# EAGLE board 74HC-RGB-Cube (EAGLE 6.5.0)
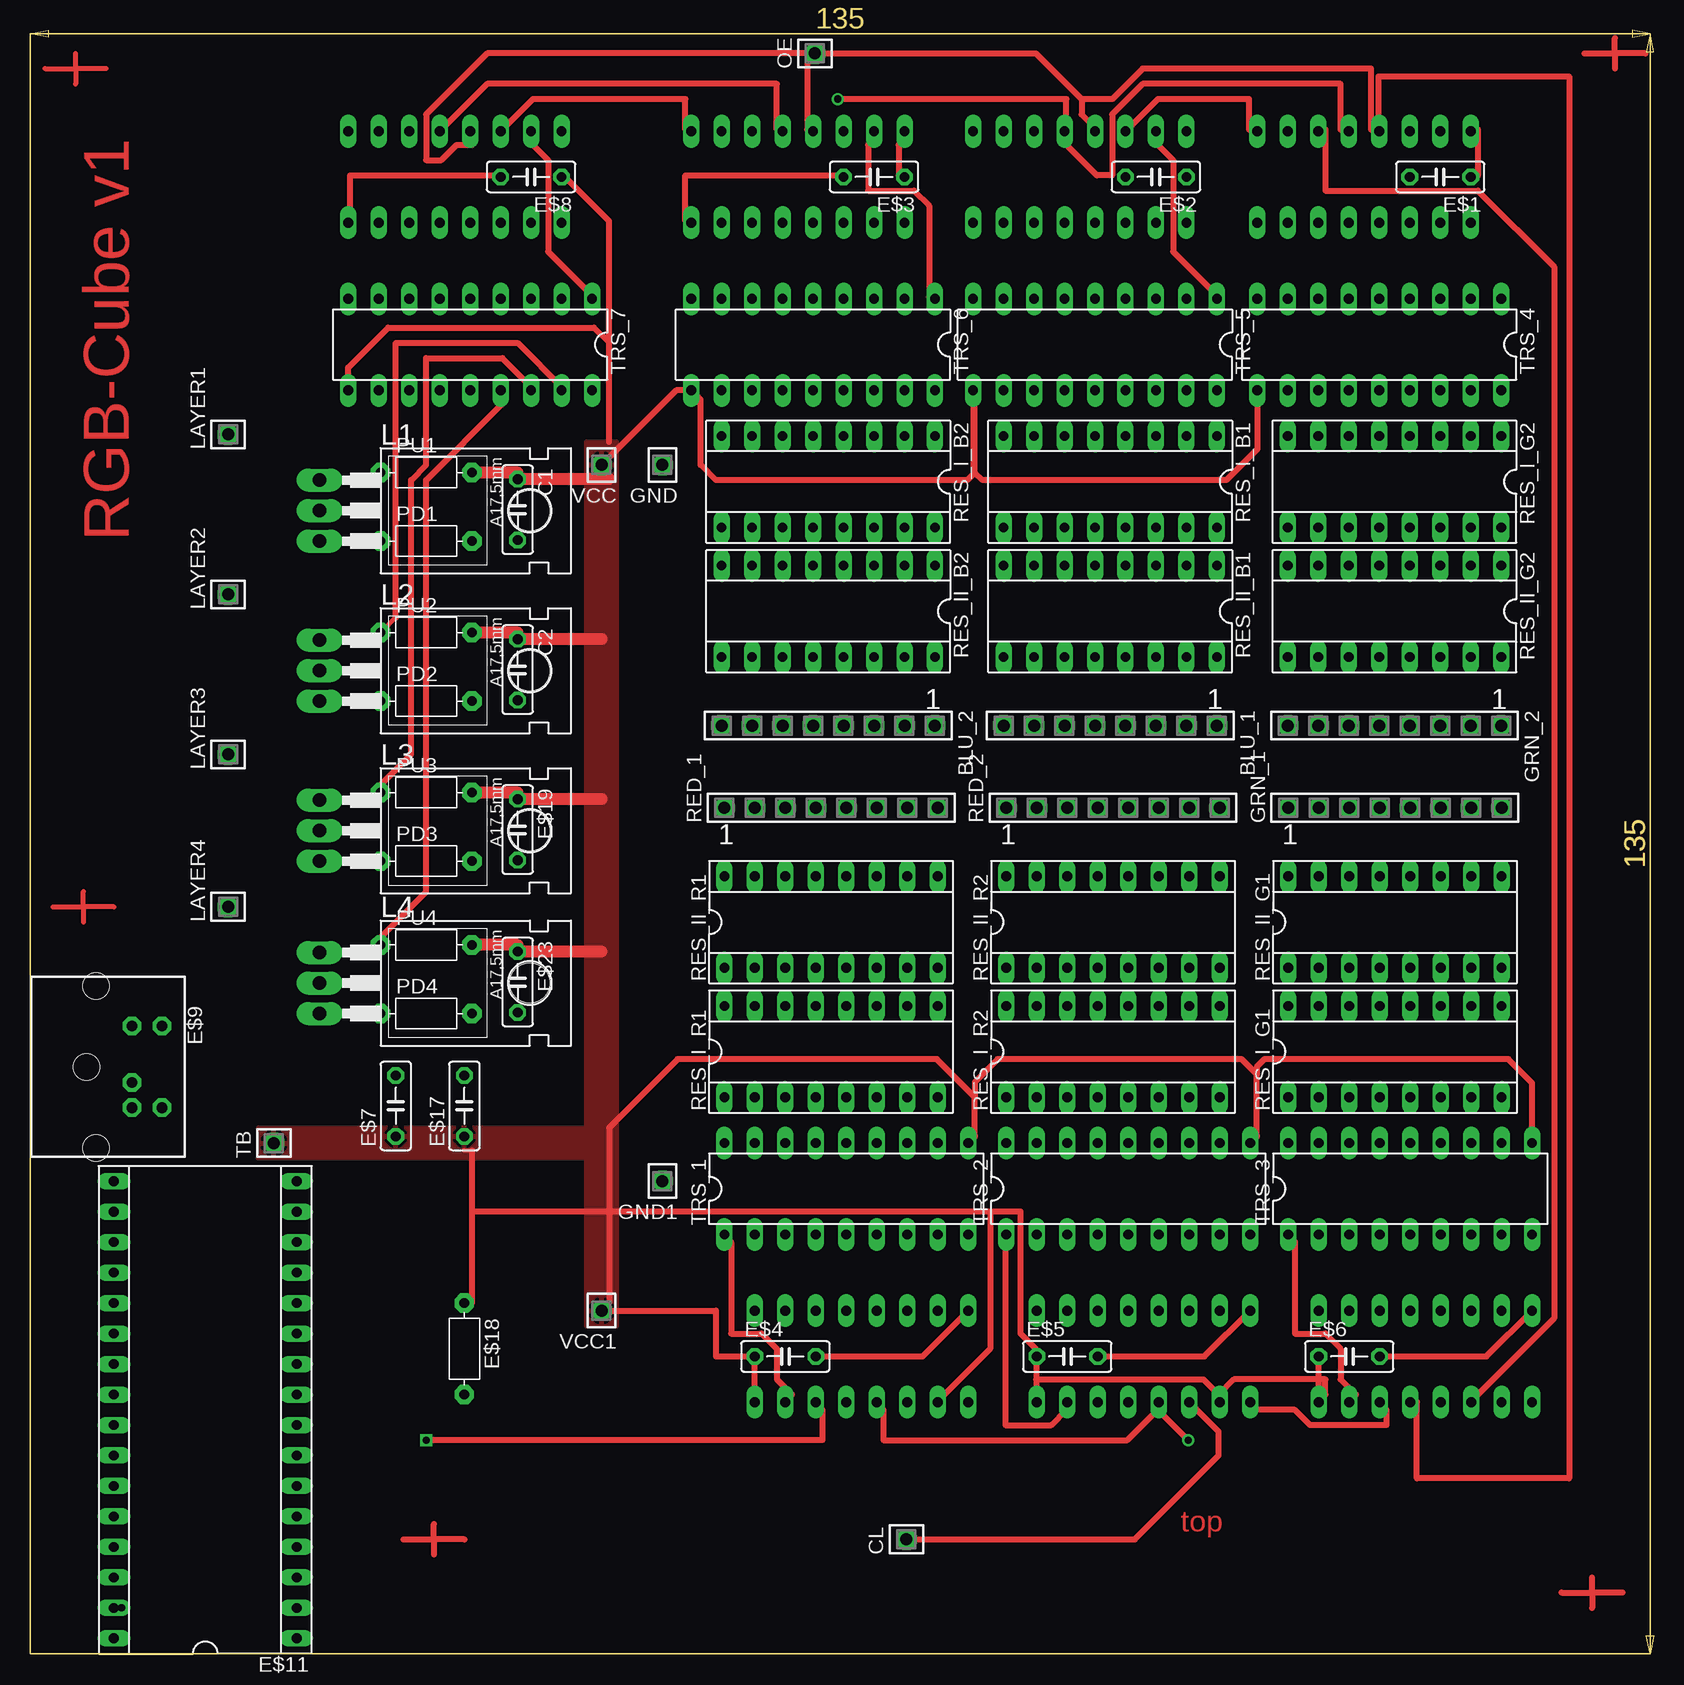
[diagram p0: board, top side]
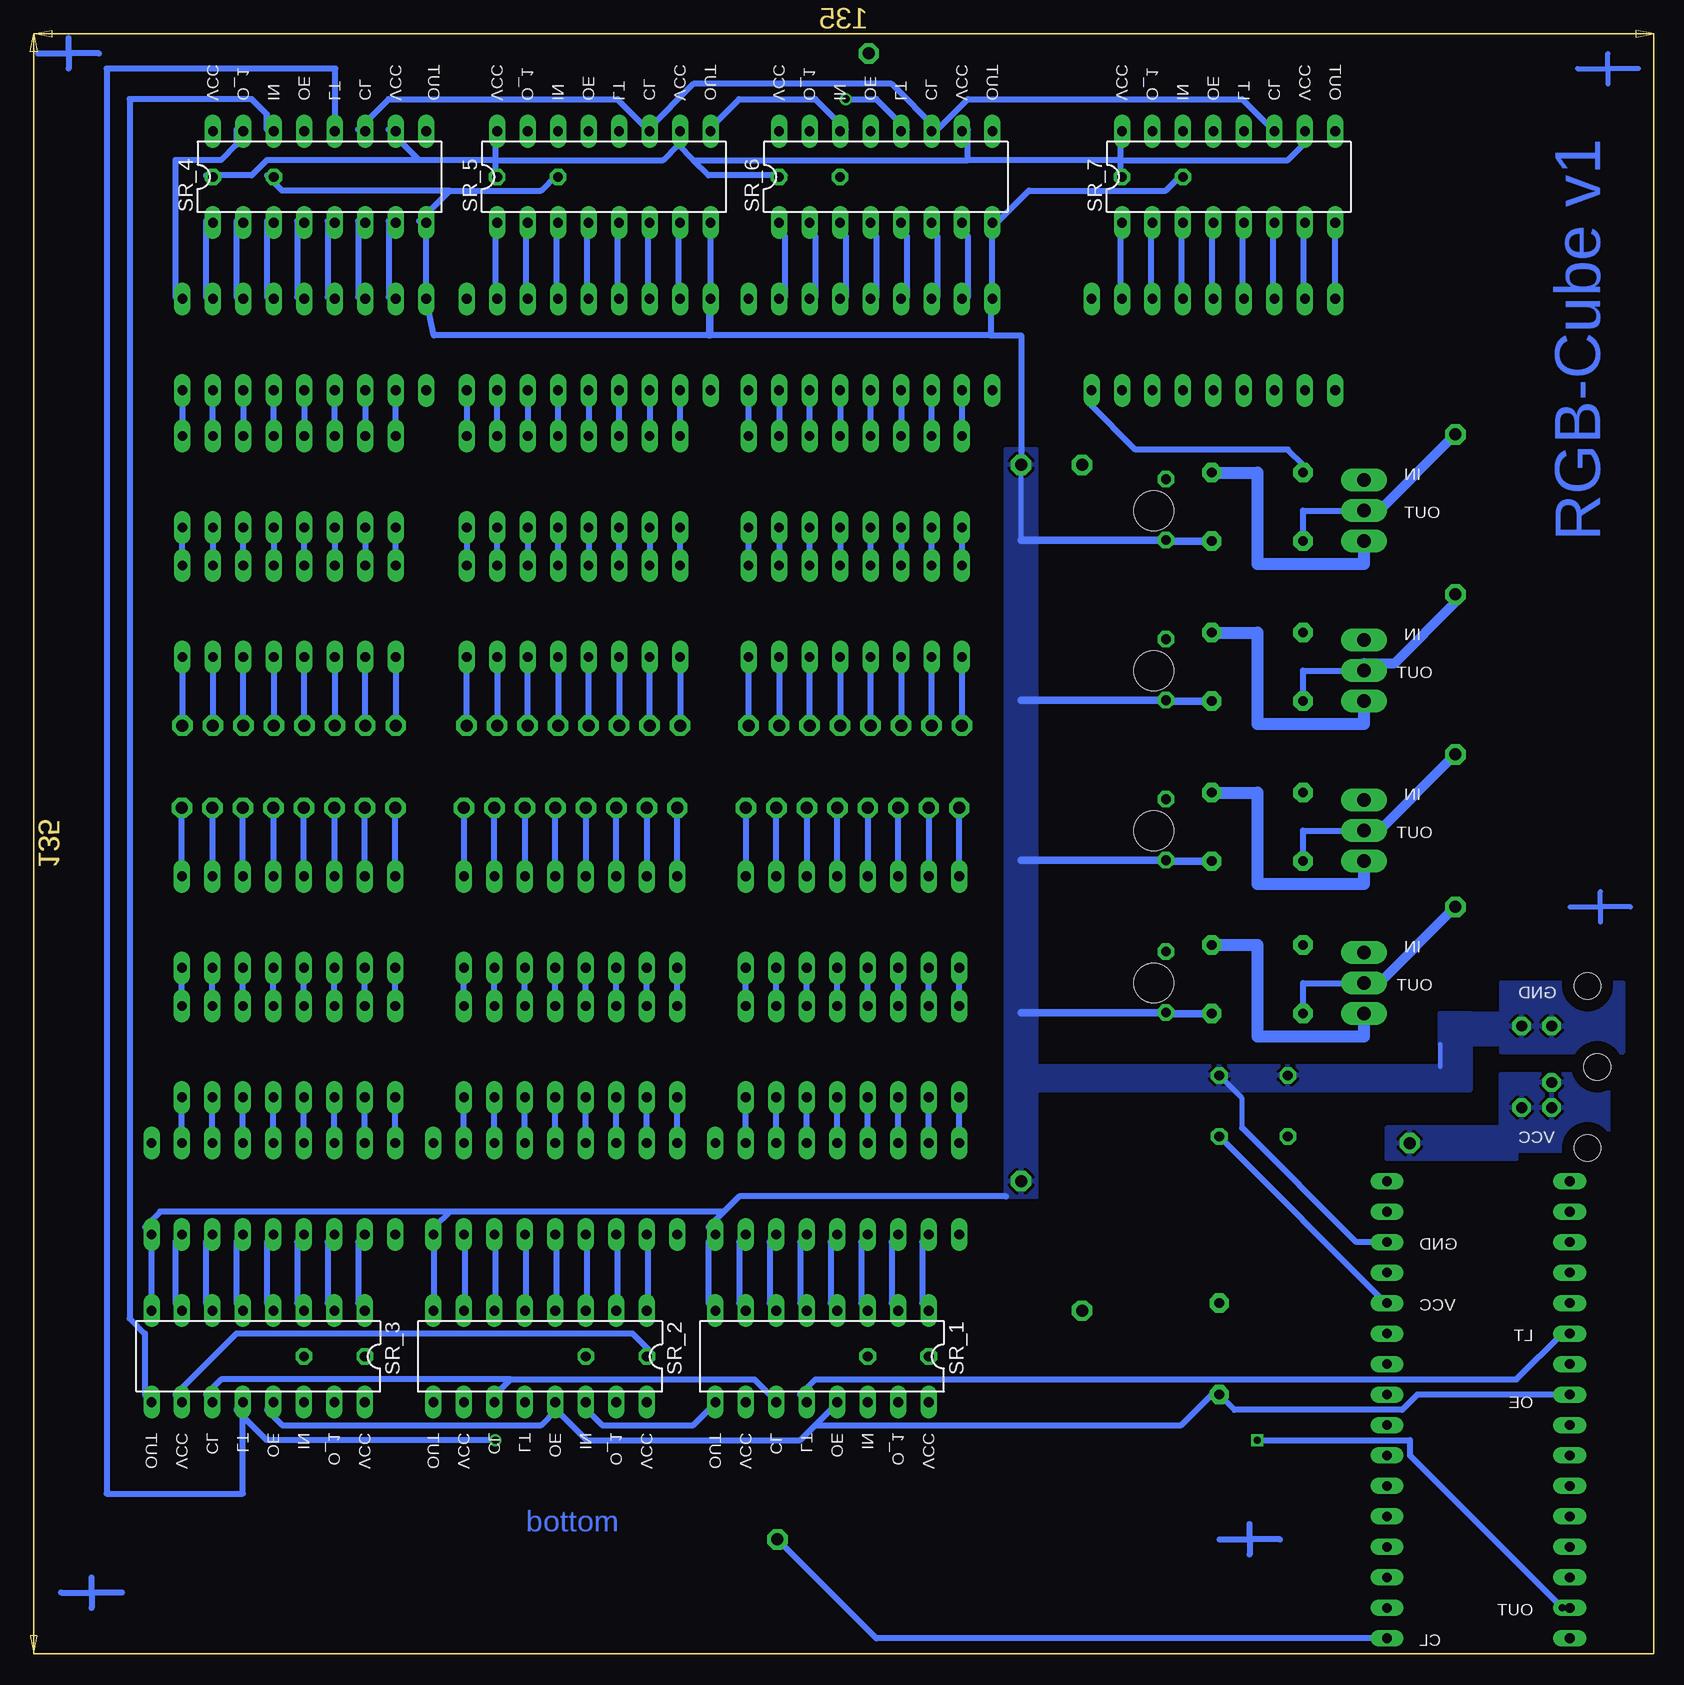
[diagram p1: board, bottom side, seen from below]

Size 135.3 x 135.3 mm. Coordinates in mm from the lower left corner, seen from the top.
Copper layers (1*16): Top 0.035mm / dielectric 1.5mm / Bottom 0.035mm
Design rules "default *": minimum track width 15mil, minimum drill 24mil, track to track 8mil, track to pad 8mil, pad to pad 8mil, via to via 8mil, smd to smd 8mil, copper to edge 40mil, drill to drill 8mil, minimum pad ring 10mil, minimum via ring 8mil, stop-mask expansion 4mil, vias tented up to drill 0mil, thermal gap 10mil

## Footprints (pad centres in the part's own frame; a part is rotated, then mirrored left to right if it is on the bottom)
SSW-108-02-S-S = drill 1 pad 1.5 octagon: 1 -8.89,0; 2 -6.35,0; 3 -3.81,0; 4 -1.27,0; 5 1.27,0; 6 3.81,0; 7 6.35,0; 8 8.89,0
C050-025X075 = drill 0.813 octagon: 1 -2.54,0; 2 2.54,0
SSW-101-02-S-S = drill 1 pad 1.5 octagon: 1 0,0
MDIN05SS = drill 0.9 octagon: 1 1.3,8.5; 2 3.4,8.5; 3 -3.4,8.5; 4 3.4,11; 5 -3.4,11 | hole 2.2: -6.75,5.5; 0,4.7; 6.75,5.5
SOCKET-32 = drill 0.813 long: 1 -19.05,-7.62; 2 -16.51,-7.62; 3 -13.97,-7.62; 4 -11.43,-7.62; 5 -8.89,-7.62; 6 -6.35,-7.62; 7 -3.81,-7.62; 8 -1.27,-7.62; 9 1.27,-7.62; 10 3.81,-7.62; 11 6.35,-7.62; 12 8.89,-7.62; 13 11.43,-7.62; 14 13.97,-7.62; 15 16.51,-7.62; 16 19.05,-7.62; 17 19.05,7.62; 18 16.51,7.62; 19 13.97,7.62; 20 11.43,7.62; 21 8.89,7.62; 22 6.35,7.62; 23 3.81,7.62; 24 1.27,7.62; 25 -1.27,7.62; 26 -3.81,7.62; 27 -6.35,7.62; 28 -8.89,7.62; 29 -11.43,7.62; 30 -13.97,7.62; 31 -16.51,7.62; 32 -19.05,7.62
R-7,5 = drill 0.813 pad 1.6 octagon: 1 -3.81,0; 2 3.81,0
TO220AB = drill 1.118 long: A1 -2.54,-6.35; A2 2.54,-6.35; C 0,-6.35 | hole 3.302: 0,11.176
SOCKET-16 = drill 0.813 long: 1 -8.89,-3.81; 2 -6.35,-3.81; 3 -3.81,-3.81; 4 -1.27,-3.81; 5 1.27,-3.81; 6 3.81,-3.81; 7 6.35,-3.81; 8 8.89,-3.81; 9 8.89,3.81; 10 6.35,3.81; 11 3.81,3.81; 12 1.27,3.81; 13 -1.27,3.81; 14 -3.81,3.81; 15 -6.35,3.81; 16 -8.89,3.81
DIL16 = drill 0.813 long: 1 -8.89,-3.81; 2 -6.35,-3.81; 3 -3.81,-3.81; 4 -1.27,-3.81; 5 1.27,-3.81; 6 3.81,-3.81; 7 6.35,-3.81; 8 8.89,-3.81; 9 8.89,3.81; 10 6.35,3.81; 11 3.81,3.81; 12 1.27,3.81; 13 -1.27,3.81; 14 -3.81,3.81; 15 -6.35,3.81; 16 -8.89,3.81
DIL18 = drill 0.813 long: 1 -10.16,-3.81; 2 -7.62,-3.81; 3 -5.08,-3.81; 4 -2.54,-3.81; 5 0,-3.81; 6 2.54,-3.81; 7 5.08,-3.81; 8 7.62,-3.81; 9 10.16,-3.81; 10 10.16,3.81; 11 7.62,3.81; 12 5.08,3.81; 13 2.54,3.81; 14 0,3.81; 15 -2.54,3.81; 16 -5.08,3.81; 17 -7.62,3.81; 18 -10.16,3.81

## Placement (x,y rotation side)
BLU_1  [SSW-108-02-S-S]  90.02,77.33 180 top
BLU_2  [SSW-108-02-S-S]  66.53,77.33 180 top
C1  47uF  [C050-025X075]  40.64,95.33 270 top
C2  47uF  [C050-025X075]  40.64,82 270 top
CL  [SSW-101-02-S-S]  73.03,9.53 0 top
E$1  [C050-025X075]  117.52,123.06 180 top
E$2  [C050-025X075]  93.83,123.06 180 top
E$3  [C050-025X075]  70.33,123.06 180 top
E$4  [C050-025X075]  62.95,24.77 0 top
E$5  [C050-025X075]  86.44,24.77 0 top
E$6  [C050-025X075]  109.94,24.77 0 top
E$7  47uF  [C050-025X075]  30.48,45.64 90 top
E$8  [C050-025X075]  41.76,123.06 180 top
E$9  [MDIN05SS]  0,48.9 270 top
E$11  [SOCKET-32]  14.61,20.32 90 top
E$17  0.1uF  [C050-025X075]  36.2,45.64 90 top
E$18  10k  [R-7,5]  36.2,25.4 270 top
E$19  47uF  [C050-025X075]  40.64,68.66 270 top
E$23  47uF  [C050-025X075]  40.64,55.96 270 top
GND  [SSW-101-02-S-S]  52.7,99.06 90 top
GND1  [SSW-101-02-S-S]  52.7,39.37 90 top
GRN_1  [SSW-108-02-S-S]  113.75,70.48 0 top
GRN_2  [SSW-108-02-S-S]  113.71,77.33 180 top
L1  [TO220AB]  30.48,95.25 270 top
L2  [TO220AB]  30.48,81.92 270 top
L3  [TO220AB]  30.48,68.58 270 top
L4  [TO220AB]  30.48,55.88 270 top
LAYER1  [SSW-101-02-S-S]  16.51,101.6 0 top
LAYER2  [SSW-101-02-S-S]  16.51,88.27 0 top
LAYER3  [SSW-101-02-S-S]  16.51,74.93 0 top
LAYER4  [SSW-101-02-S-S]  16.51,62.23 0 top
OE  [SSW-101-02-S-S]  65.41,133.35 0 top
PD1  10k  [R-7,5]  33.02,92.71 0 top
PD2  10k  [R-7,5]  33.02,79.38 0 top
PD3  10k  [R-7,5]  33.02,66.04 0 top
PD4  10k  [R-7,5]  33.02,53.34 0 top
PU1  10k  [R-7,5]  33.02,98.42 0 top
PU2  10k  [R-7,5]  33.02,85.09 0 top
PU3  10k  [R-7,5]  33.02,71.75 0 top
PU4  10k  [R-7,5]  33.02,59.05 0 top
RED_1  [SSW-108-02-S-S]  66.75,70.48 0 top
RED_2  [SSW-108-02-S-S]  90.25,70.48 0 top
RES_I_B1  Resitor I  [SOCKET-16]  90.02,97.66 180 top
RES_I_B2  Resitor I  [SOCKET-16]  66.53,97.66 180 top
RES_I_G1  Resitor I  [SOCKET-16]  113.75,50.16 0 top
RES_I_G2  Resitor I  [SOCKET-16]  113.71,97.66 180 top
RES_I_R1  Resitor I  [SOCKET-16]  66.75,50.16 0 top
RES_I_R2  Resitor I  [SOCKET-16]  90.25,50.16 0 top
RES_II_B1  Resistor II  [SOCKET-16]  90.02,86.86 180 top
RES_II_B2  Resistor II  [SOCKET-16]  66.53,86.86 180 top
RES_II_G1  Resistor II  [SOCKET-16]  113.75,60.96 0 top
RES_II_G2  Resistor II  [SOCKET-16]  113.71,86.86 180 top
RES_II_R1  Resistor II  [SOCKET-16]  66.75,60.96 0 top
RES_II_R2  Resistor II  [SOCKET-16]  90.25,60.96 0 top
SR_1  74HC595N  [DIL16]  69.3,24.77 180 bottom
SR_2  74HC595N  [DIL16]  92.79,24.77 180 bottom
SR_3  74HC595N  [DIL16]  116.28,24.77 180 bottom
SR_4  74HC595N  [DIL16]  111.17,123.06 0 bottom
SR_5  74HC595N  [DIL16]  87.48,123.06 0 bottom
SR_6  74HC595N  [DIL16]  63.98,123.06 0 bottom
SR_7  74HC595N  [DIL16]  35.41,123.06 0 bottom
TB  [SSW-101-02-S-S]  20.32,42.55 0 top
TRS_1  ULN2803B  [DIL18]  68.03,38.73 0 top
TRS_2  ULN2803B  [DIL18]  91.52,38.73 0 top
TRS_3  ULN2803B  [DIL18]  115.02,38.73 0 top
TRS_4  ULN2803B  [DIL18]  112.44,109.08 180 top
TRS_5  ULN2803B  [DIL18]  88.75,109.08 180 top
TRS_6  ULN2803B  [DIL18]  65.25,109.08 180 top
TRS_7  ULN2803B  [DIL18]  36.68,109.08 180 top
VCC  [SSW-101-02-S-S]  47.62,99.06 90 top
VCC1  [SSW-101-02-S-S]  47.62,28.57 90 top

## Library data of the parts
BLU_1 BLU_2 CL GND GND1 GRN_1 GRN_2 LAYER1-LAYER4 OE RED_1 RED_2 TB VCC VCC1 = con-samtec
C1 C2 E$1-E$8 E$17 E$19 E$23 = rcl
E$9 = con-yamaichi
E$11 RES_I_B1 RES_I_B2 RES_I_G1 RES_I_G2 RES_I_R1 RES_I_R2 RES_II_B1 RES_II_B2 RES_II_G1 RES_II_G2 RES_II_R1 RES_II_R2 = ic-package
E$18 PD1-PD4 PU1-PU4 = discrete
L1-L4 = diode
SR_1-SR_7 = 74xx-eu
TRS_1-TRS_7 = uln-udn

## Nets
CL: CL.1 E$11.1 SR_1.11 SR_2.11 SR_3.11 SR_4.11 SR_5.11 SR_6.11 SR_7.11
GND: C1.2 C2.2 E$1.2 E$2.2 E$3.2 E$4.2 E$5.2 E$6.2 E$7.2 E$8.2 E$9.3 E$9.5 E$11.14 E$17.2 E$19.2 E$23.2 GND1.1 GND.1 PD1.2 PD2.2 PD3.2 PD4.2 SR_1.8 SR_2.8 SR_3.8 SR_4.8 SR_5.8 SR_6.8 SR_7.8 TRS_1.9 TRS_2.9 TRS_3.9 TRS_4.9 TRS_5.9 TRS_6.9 TRS_7.9
LT: E$11.22 SR_1.12 SR_2.12 SR_3.12 SR_4.12 SR_5.12 SR_6.12 SR_7.12
OE: E$11.24 E$18.2 OE.1 SR_1.13 SR_2.13 SR_3.13 SR_4.13 SR_5.13 SR_6.13 SR_7.13
S$1: SR_1.7 TRS_1.8
S$2: SR_1.6 TRS_1.7
S$3: SR_1.5 TRS_1.6
S$4: SR_1.4 TRS_1.5
S$5: SR_1.3 TRS_1.4
S$6: SR_1.2 TRS_1.3
S$7: SR_1.1 TRS_1.2
S$8: SR_1.15 TRS_1.1
S$9: RES_I_R1.8 TRS_1.11
S$10: RES_I_R1.7 TRS_1.12
S$11: RES_I_R1.6 TRS_1.13
S$12: RES_I_R1.5 TRS_1.14
S$13: RES_I_R1.4 TRS_1.15
S$14: RES_I_R1.3 TRS_1.16
S$15: RES_I_R1.2 TRS_1.17
S$16: RES_I_R1.1 TRS_1.18
S$17: RES_I_R1.16 RES_II_R1.1
S$18: RES_I_R1.15 RES_II_R1.2
S$19: RES_I_R1.14 RES_II_R1.3
S$20: RES_I_R1.13 RES_II_R1.4
S$21: RES_I_R1.12 RES_II_R1.5
S$22: RES_I_R1.11 RES_II_R1.6
S$23: RES_I_R1.10 RES_II_R1.7
S$24: RES_I_R1.9 RES_II_R1.8
S$25: RED_1.1 RES_II_R1.16
S$26: RED_1.2 RES_II_R1.15
S$27: RED_1.3 RES_II_R1.14
S$28: RED_1.4 RES_II_R1.13
S$29: RED_1.5 RES_II_R1.12
S$30: RED_1.6 RES_II_R1.11
S$31: RED_1.7 RES_II_R1.10
S$32: RED_1.8 RES_II_R1.9
S$33: SR_2.7 TRS_2.8
S$34: SR_2.6 TRS_2.7
S$35: SR_2.5 TRS_2.6
S$36: SR_2.4 TRS_2.5
S$37: SR_2.3 TRS_2.4
S$38: SR_2.2 TRS_2.3
S$39: SR_2.1 TRS_2.2
S$40: SR_2.15 TRS_2.1
S$41: RES_I_R2.8 TRS_2.11
S$42: RES_I_R2.7 TRS_2.12
S$43: RES_I_R2.6 TRS_2.13
S$44: RES_I_R2.5 TRS_2.14
S$45: RES_I_R2.4 TRS_2.15
S$46: RES_I_R2.3 TRS_2.16
S$47: RES_I_R2.2 TRS_2.17
S$48: RES_I_R2.1 TRS_2.18
S$49: RES_I_R2.16 RES_II_R2.1
S$50: RES_I_R2.15 RES_II_R2.2
S$51: RES_I_R2.14 RES_II_R2.3
S$52: RES_I_R2.13 RES_II_R2.4
S$53: RES_I_R2.12 RES_II_R2.5
S$54: RES_I_R2.11 RES_II_R2.6
S$55: RES_I_R2.10 RES_II_R2.7
S$56: RES_I_R2.9 RES_II_R2.8
S$57: RED_2.1 RES_II_R2.16
S$58: RED_2.2 RES_II_R2.15
S$59: RED_2.3 RES_II_R2.14
S$60: RED_2.4 RES_II_R2.13
S$61: RED_2.5 RES_II_R2.12
S$62: RED_2.6 RES_II_R2.11
S$63: RED_2.7 RES_II_R2.10
S$64: RED_2.8 RES_II_R2.9
S$65: SR_3.7 TRS_3.8
S$66: SR_3.6 TRS_3.7
S$67: SR_3.5 TRS_3.6
S$68: SR_3.4 TRS_3.5
S$69: SR_3.3 TRS_3.4
S$70: SR_3.2 TRS_3.3
S$71: SR_3.1 TRS_3.2
S$72: SR_3.15 TRS_3.1
S$73: RES_I_G1.8 TRS_3.11
S$74: RES_I_G1.7 TRS_3.12
S$75: RES_I_G1.6 TRS_3.13
S$76: RES_I_G1.5 TRS_3.14
S$77: RES_I_G1.4 TRS_3.15
S$78: RES_I_G1.3 TRS_3.16
S$79: RES_I_G1.2 TRS_3.17
S$80: RES_I_G1.1 TRS_3.18
S$81: RES_I_G1.16 RES_II_G1.1
S$82: RES_I_G1.15 RES_II_G1.2
S$83: RES_I_G1.14 RES_II_G1.3
S$84: RES_I_G1.13 RES_II_G1.4
S$85: RES_I_G1.12 RES_II_G1.5
S$86: RES_I_G1.11 RES_II_G1.6
S$87: RES_I_G1.10 RES_II_G1.7
S$88: RES_I_G1.9 RES_II_G1.8
S$89: GRN_1.1 RES_II_G1.16
S$90: GRN_1.2 RES_II_G1.15
S$91: GRN_1.3 RES_II_G1.14
S$92: GRN_1.4 RES_II_G1.13
S$93: GRN_1.5 RES_II_G1.12
S$94: GRN_1.6 RES_II_G1.11
S$95: GRN_1.7 RES_II_G1.10
S$96: GRN_1.8 RES_II_G1.9
S$97: SR_1.9 SR_2.14
S$98: SR_2.9 SR_3.14
S$99: E$11.31 SR_1.14
S$103: SR_3.9 SR_4.14
S$104: SR_4.7 TRS_4.8
S$105: SR_4.6 TRS_4.7
S$106: SR_4.5 TRS_4.6
S$107: SR_4.4 TRS_4.5
S$108: SR_4.3 TRS_4.4
S$109: SR_4.2 TRS_4.3
S$110: SR_4.1 TRS_4.2
S$111: SR_4.15 TRS_4.1
S$112: RES_I_G2.8 TRS_4.11
S$113: RES_I_G2.7 TRS_4.12
S$114: RES_I_G2.6 TRS_4.13
S$115: RES_I_G2.5 TRS_4.14
S$116: RES_I_G2.4 TRS_4.15
S$117: RES_I_G2.3 TRS_4.16
S$118: RES_I_G2.2 TRS_4.17
S$119: RES_I_G2.1 TRS_4.18
S$120: RES_I_G2.16 RES_II_G2.1
S$121: RES_I_G2.15 RES_II_G2.2
S$122: RES_I_G2.14 RES_II_G2.3
S$123: RES_I_G2.13 RES_II_G2.4
S$124: RES_I_G2.12 RES_II_G2.5
S$125: RES_I_G2.11 RES_II_G2.6
S$126: RES_I_G2.10 RES_II_G2.7
S$127: RES_I_G2.9 RES_II_G2.8
S$128: GRN_2.1 RES_II_G2.16
S$129: GRN_2.2 RES_II_G2.15
S$130: GRN_2.3 RES_II_G2.14
S$131: GRN_2.4 RES_II_G2.13
S$132: GRN_2.5 RES_II_G2.12
S$133: GRN_2.6 RES_II_G2.11
S$134: GRN_2.7 RES_II_G2.10
S$135: GRN_2.8 RES_II_G2.9
S$136: SR_5.7 TRS_5.8
S$137: SR_5.6 TRS_5.7
S$138: SR_5.5 TRS_5.6
S$139: SR_5.4 TRS_5.5
S$140: SR_4.9 SR_5.14
S$141: SR_5.3 TRS_5.4
S$142: SR_5.2 TRS_5.3
S$143: SR_5.1 TRS_5.2
S$144: SR_5.15 TRS_5.1
S$145: RES_I_B1.8 TRS_5.11
S$146: RES_I_B1.7 TRS_5.12
S$147: RES_I_B1.6 TRS_5.13
S$148: RES_I_B1.5 TRS_5.14
S$149: RES_I_B1.4 TRS_5.15
S$150: RES_I_B1.3 TRS_5.16
S$151: RES_I_B1.2 TRS_5.17
S$152: RES_I_B1.1 TRS_5.18
S$153: RES_I_B1.16 RES_II_B1.1
S$154: RES_I_B1.15 RES_II_B1.2
S$155: RES_I_B1.14 RES_II_B1.3
S$156: RES_I_B1.13 RES_II_B1.4
S$157: RES_I_B1.12 RES_II_B1.5
S$158: RES_I_B1.11 RES_II_B1.6
S$159: RES_I_B1.10 RES_II_B1.7
S$160: RES_I_B1.9 RES_II_B1.8
S$161: BLU_1.1 RES_II_B1.16
S$162: BLU_1.2 RES_II_B1.15
S$163: BLU_1.3 RES_II_B1.14
S$164: BLU_1.4 RES_II_B1.13
S$165: BLU_1.5 RES_II_B1.12
S$166: BLU_1.6 RES_II_B1.11
S$167: BLU_1.7 RES_II_B1.10
S$168: BLU_1.8 RES_II_B1.9
S$169: SR_5.9 SR_6.14
S$170: SR_6.7 TRS_6.8
S$171: SR_6.6 TRS_6.7
S$172: SR_6.5 TRS_6.6
S$173: SR_6.4 TRS_6.5
S$174: SR_6.3 TRS_6.4
S$175: SR_6.2 TRS_6.3
S$176: SR_6.1 TRS_6.2
S$177: SR_6.15 TRS_6.1
S$178: RES_I_B2.8 TRS_6.11
S$179: RES_I_B2.7 TRS_6.12
S$180: RES_I_B2.6 TRS_6.13
S$181: RES_I_B2.5 TRS_6.14
S$182: RES_I_B2.4 TRS_6.15
S$183: RES_I_B2.3 TRS_6.16
S$184: RES_I_B2.2 TRS_6.17
S$185: RES_I_B2.1 TRS_6.18
S$186: RES_I_B2.16 RES_II_B2.1
S$187: RES_I_B2.15 RES_II_B2.2
S$188: RES_I_B2.14 RES_II_B2.3
S$189: RES_I_B2.13 RES_II_B2.4
S$190: RES_I_B2.12 RES_II_B2.5
S$191: RES_I_B2.11 RES_II_B2.6
S$192: RES_I_B2.10 RES_II_B2.7
S$193: RES_I_B2.9 RES_II_B2.8
S$194: BLU_2.1 RES_II_B2.16
S$195: BLU_2.2 RES_II_B2.15
S$196: BLU_2.3 RES_II_B2.14
S$197: BLU_2.4 RES_II_B2.13
S$198: BLU_2.5 RES_II_B2.12
S$199: BLU_2.6 RES_II_B2.11
S$200: BLU_2.7 RES_II_B2.10
S$201: BLU_2.8 RES_II_B2.9
S$202: SR_6.9 SR_7.14
S$203: L1.A1 PU1.1 TRS_7.18
S$205: L1.C LAYER1.1 PD1.1
S$206: L2.A1 PU2.1 TRS_7.17
S$207: L2.C LAYER2.1 PD2.1
S$208: SR_7.7 TRS_7.8
S$209: SR_7.6 TRS_7.7
S$210: SR_7.5 TRS_7.6
S$211: SR_7.4 TRS_7.5
S$212: SR_7.3 TRS_7.4
S$213: SR_7.2 TRS_7.3
S$214: SR_7.1 TRS_7.2
S$215: SR_7.15 TRS_7.1
S$216: L3.A1 PU3.1 TRS_7.16
S$217: L3.C LAYER3.1 PD3.1
S$219: L4.A1 PU4.1 TRS_7.15
S$220: L4.C LAYER4.1 PD4.1
S$224: SR_7.9
VCC: C1.1 C2.1 E$1.1 E$2.1 E$3.1 E$4.1 E$5.1 E$6.1 E$7.1 E$8.1 E$9.1 E$9.2 E$9.4 E$11.12 E$17.1 E$18.1 E$19.1 E$23.1 L1.A2 L2.A2 L3.A2 L4.A2 PU1.2 PU2.2 PU3.2 PU4.2 SR_1.10 SR_1.16 SR_2.10 SR_2.16 SR_3.10 SR_3.16 SR_4.10 SR_4.16 SR_5.10 SR_5.16 SR_6.10 SR_6.16 SR_7.10 SR_7.16 TB.1 TRS_1.10 TRS_2.10 TRS_3.10 TRS_4.10 TRS_5.10 TRS_6.10 TRS_7.10 VCC1.1 VCC.1

## Tracks (layer width: path | path; a pad name or v marks a point on that pad's centre or on a via)
CL
  Top 0.508: SR_3.11 120.65,21.59 127,27.94 127,115.57 120.65,121.92 107.95,121.92 107.95,127 SR_4.11 | CL.1 92.08,9.53 99.06,16.51 99.06,18.5 SR_2.11
  Bottom 0.508: 95.25,22.86 74.93,22.86 73.66,21.59 SR_1.11 | 95.25,22.86 96.52,21.59 SR_2.11 | 95.25,22.86 119.38,22.86 120.65,21.59 SR_3.11 | 83.82,127 86.36,129.54 105.41,129.54 107.95,127 SR_4.11 | 59.69,127 57.15,129.54 34.29,129.54 31.75,127 SR_7.11 | 83.82,127 80.01,130.81 63.5,130.81 59.69,127 | 83.82,127 SR_5.11 | 59.69,127 SR_6.11 | CL.1 64.77,1.27 E$11.1
GND
  Top 0.508: E$4.2 74.38,24.77 SR_1.8 | E$5.2 97.87,24.77 SR_2.8 | E$6.2 121.36,24.77 SR_3.8 | E$8.2 39.37,123.19 26.67,123.19 26.67,119.38 SR_7.8 | E$3.2 67.31,123.19 54.61,123.19 54.61,119.38 SR_6.8
  Bottom 0.381: 17.78,48.9 17.78,50.8
  Bottom 0.406: 52.7,92.79 GND.1 | 40.64,92.71 C1.2 | 40.64,79.38 C2.2 | 40.64,66.04 E$19.2 | 40.64,53.34 E$23.2 | 34.29,43.81 34.29,46.27 E$17.2
  Bottom 0.508: SR_3.8 TRS_3.9 125.73,35.56 124.46,36.83 100.33,36.83 | TRS_5.9 SR_5.8 | TRS_5.9 78.74,112.89 78.74,109.86 101.64,109.86 TRS_4.9 SR_4.8 102.87,119.38 100.33,121.92 | TRS_5.9 78.59,109.86 55.24,109.86 | SR_7.8 TRS_7.9 26.67,112.89 | 55.24,109.86 55.24,112.89 TRS_6.9 SR_6.8 54.61,119.38 52.07,121.92 40.64,121.92 39.37,123.19 E$8.2 | 55.24,109.86 52.7,109.86 GND.1 | SR_2.8 101.6,29.21 101.6,34.29 TRS_2.9 101.6,35.56 100.33,36.83 | SR_1.8 78.74,29.21 78.74,34.29 TRS_1.9 78.74,35.56 77.47,36.83 | 100.33,121.92 92.71,121.92 91.44,123.19 E$2.2 | 100.33,121.92 114.3,121.92 115.57,123.19 E$1.2 | 77.47,36.83 76.2,38.1 53.98,38.1 | 77.47,36.83 100.33,36.83 | E$11.14 24.77,34.29 34.29,43.81
  Bottom 0.61: C1.2 52.7,92.79 | PD1.2 40.64,92.71 | C2.2 52.7,79.45 | PD2.2 40.64,79.38 | E$19.2 52.7,66.12 | PD3.2 40.64,66.04 | E$23.2 52.7,53.42 | PD4.2 40.64,53.34
  pour Bottom: 53.98,38.1 51.44,38.1 51.44,100.33 53.98,100.33
  pour Bottom: 53.34,46.99 16.51,46.99 16.51,48.9 53.34,48.9
  pour Bottom: 17.78,46.99 15.24,46.99 15.24,53.34 17.78,53.34
  pour Bottom: 17.78,53.34 7.62,53.34 7.62,50.8 17.78,50.8
  pour Bottom: 12.7,50.16 2.54,50.16 2.54,52.07 2.54,55.88 12.7,55.88 12.7,53.98
LT  (via drill 0.61)
  Top 0.508: SR_7.12 34.29,127 38.1,130.81 62.23,130.81 62.23,127 SR_6.12 | SR_4.12 109.22,127 109.22,130.81 92.71,130.81 90.17,128.27 90.17,123.19 88.9,123.19 86.36,125.73 SR_5.12 86.36,127 86.36,129.54 v67.31,129.54 | 93.98,20.32 91.44,17.78 71.12,17.78 71.12,20.32 SR_1.12 | 93.98,20.32 v96.52,17.78 | 93.98,20.32 SR_2.12
  Bottom 0.508: SR_4.12 109.86,126.86 109.86,132.08 128.91,132.08 128.91,13.34 117.56,13.34 SR_3.12 118.11,20.32 115.57,17.78 v96.52,17.78 | E$11.22 7.62,26.67 11.43,22.86 69.85,22.86 71.12,21.59 SR_1.12 | v67.31,129.54 64.77,129.54 62.23,127 SR_6.12
OE
  Top 0.508: SR_3.13 115.57,20.95 115.57,14.61 128.27,14.61 128.27,131.44 112.39,131.44 112.39,126.86 SR_4.13 111.76,127 111.76,132.08 92.71,132.08 90.17,129.54 87.63,129.54 | 64.77,133.35 38.1,133.35 33.02,128.27 33.02,124.46 34.29,124.46 35.56,125.73 36.83,125.73 SR_7.13 | 64.77,133.35 64.77,127 SR_6.13 | 64.77,133.35 OE.1 83.82,133.35 87.63,129.54 | 87.63,129.54 87.63,128.27 88.9,127 SR_5.13
  Bottom 0.508: E$11.24 19.68,21.59 20.95,20.32 34.92,20.32 E$18.2 36.83,21.59 39.37,19.05 69.85,19.05 | 69.85,19.05 71.12,17.78 88.9,17.78 91.44,20.32 | 69.85,19.05 68.58,20.32 SR_1.13 | 91.44,20.32 92.71,19.05 114.3,19.05 115.57,20.32 SR_3.13 | 91.44,20.32 SR_2.13
S$1
  Bottom 0.508: SR_1.7 76.2,29.21 76.2,34.29 TRS_1.8
S$2
  Bottom 0.508: SR_1.6 73.66,29.21 73.66,34.29 TRS_1.7
S$3
  Bottom 0.508: SR_1.5 71.12,29.21 71.12,34.29 TRS_1.6
S$4
  Bottom 0.508: SR_1.4 68.58,29.21 68.58,34.29 TRS_1.5
S$5
  Bottom 0.508: SR_1.3 66.04,29.21 66.04,34.29 TRS_1.4
S$6
  Bottom 0.508: SR_1.2 63.5,29.21 63.5,34.29 TRS_1.3
S$7
  Bottom 0.508: SR_1.1 60.96,29.21 60.96,34.29 TRS_1.2
S$8
  Top 0.508: SR_1.15 63.5,21.59 62.23,22.86 62.23,25.4 60.96,26.67 58.42,26.67 58.42,34.29 TRS_1.1
S$9
  Bottom 0.508: TRS_1.11 RES_I_R1.8
S$10
  Bottom 0.508: TRS_1.12 RES_I_R1.7
S$11
  Bottom 0.508: TRS_1.13 RES_I_R1.6
S$12
  Bottom 0.508: TRS_1.14 RES_I_R1.5
S$13
  Bottom 0.508: TRS_1.15 RES_I_R1.4
S$14
  Bottom 0.508: TRS_1.16 RES_I_R1.3
S$15
  Bottom 0.508: TRS_1.17 RES_I_R1.2
S$16
  Bottom 0.508: TRS_1.18 RES_I_R1.1
S$17
  Bottom 0.508: RES_I_R1.16 RES_II_R1.1
S$18
  Bottom 0.508: RES_I_R1.15 RES_II_R1.2
S$19
  Bottom 0.508: RES_I_R1.14 RES_II_R1.3
S$20
  Bottom 0.508: RES_I_R1.13 RES_II_R1.4
S$21
  Bottom 0.508: RES_I_R1.12 RES_II_R1.5
S$22
  Bottom 0.508: RES_I_R1.11 RES_II_R1.6
S$23
  Bottom 0.508: RES_I_R1.10 RES_II_R1.7
S$24
  Bottom 0.508: RES_I_R1.9 RES_II_R1.8
S$25
  Bottom 0.508: RES_II_R1.16 RED_1.1
S$26
  Bottom 0.508: RED_1.2 RES_II_R1.15
S$27
  Bottom 0.508: RES_II_R1.14 RED_1.3
S$28
  Bottom 0.508: RED_1.4 RES_II_R1.13
S$29
  Bottom 0.508: RES_II_R1.12 RED_1.5
S$30
  Bottom 0.508: RED_1.6 RES_II_R1.11
S$31
  Bottom 0.508: RES_II_R1.10 RED_1.7
S$32
  Bottom 0.508: RED_1.8 RES_II_R1.9
S$33
  Bottom 0.508: SR_2.7 99.06,29.21 99.06,34.29 TRS_2.8
S$34
  Bottom 0.508: SR_2.6 96.52,29.21 96.52,34.29 TRS_2.7
S$35
  Bottom 0.508: SR_2.5 93.98,29.21 93.98,34.29 TRS_2.6
S$36
  Bottom 0.508: SR_2.4 91.44,29.21 91.44,34.29 TRS_2.5
S$37
  Bottom 0.508: SR_2.3 88.9,29.21 88.9,34.29 TRS_2.4
S$38
  Bottom 0.508: SR_2.2 86.36,29.21 86.36,34.29 TRS_2.3
S$39
  Bottom 0.508: SR_2.1 83.82,29.21 83.82,34.29 TRS_2.2
S$40
  Top 0.508: SR_2.15 86.36,20.32 85.09,19.05 81.28,19.05 81.28,34.29 TRS_2.1
S$41
  Bottom 0.508: TRS_2.11 RES_I_R2.8
S$42
  Bottom 0.508: TRS_2.12 RES_I_R2.7
S$43
  Bottom 0.508: TRS_2.13 RES_I_R2.6
S$44
  Bottom 0.508: TRS_2.14 RES_I_R2.5
S$45
  Bottom 0.508: TRS_2.15 RES_I_R2.4
S$46
  Bottom 0.508: TRS_2.16 RES_I_R2.3
S$47
  Bottom 0.508: TRS_2.17 RES_I_R2.2
S$48
  Bottom 0.508: TRS_2.18 RES_I_R2.1
S$49
  Bottom 0.508: RES_I_R2.16 RES_II_R2.1
S$50
  Bottom 0.508: RES_I_R2.15 RES_II_R2.2
S$51
  Bottom 0.508: RES_I_R2.14 RES_II_R2.3
S$52
  Bottom 0.508: RES_I_R2.13 RES_II_R2.4
S$53
  Bottom 0.508: RES_I_R2.12 RES_II_R2.5
S$54
  Bottom 0.508: RES_I_R2.11 RES_II_R2.6
S$55
  Bottom 0.508: RES_I_R2.10 RES_II_R2.7
S$56
  Bottom 0.508: RES_I_R2.9 RES_II_R2.8
S$57
  Bottom 0.508: RES_II_R2.16 RED_2.1
S$58
  Bottom 0.508: RED_2.2 RES_II_R2.15
S$59
  Bottom 0.508: RES_II_R2.14 RED_2.3
S$60
  Bottom 0.508: RED_2.4 RES_II_R2.13
S$61
  Bottom 0.508: RES_II_R2.12 RED_2.5
S$62
  Bottom 0.508: RED_2.6 RES_II_R2.11
S$63
  Bottom 0.508: RES_II_R2.10 RED_2.7
S$64
  Bottom 0.508: RED_2.8 RES_II_R2.9
S$65
  Bottom 0.508: SR_3.7 123.19,29.21 123.19,34.29 TRS_3.8
S$66
  Bottom 0.508: SR_3.6 120.65,29.21 120.65,34.29 TRS_3.7
S$67
  Bottom 0.508: SR_3.5 118.11,29.21 118.11,34.29 TRS_3.6
S$68
  Bottom 0.508: SR_3.4 115.57,29.21 115.57,34.29 TRS_3.5
S$69
  Bottom 0.508: SR_3.3 113.03,29.21 113.03,34.29 TRS_3.4
S$70
  Bottom 0.508: SR_3.2 110.49,29.21 110.49,34.29 TRS_3.3
S$71
  Bottom 0.508: SR_3.1 107.95,29.21 107.95,34.29 TRS_3.2
S$72
  Top 0.508: SR_3.15 110.49,21.59 109.22,22.86 109.22,25.4 107.95,26.67 105.41,26.67 105.41,34.29 TRS_3.1
S$73
  Bottom 0.508: TRS_3.11 RES_I_G1.8
S$74
  Bottom 0.508: TRS_3.12 RES_I_G1.7
S$75
  Bottom 0.508: TRS_3.13 RES_I_G1.6
S$76
  Bottom 0.508: TRS_3.14 RES_I_G1.5
S$77
  Bottom 0.508: TRS_3.15 RES_I_G1.4
S$78
  Bottom 0.508: TRS_3.16 RES_I_G1.3
S$79
  Bottom 0.508: TRS_3.17 RES_I_G1.2
S$80
  Bottom 0.508: TRS_3.18 RES_I_G1.1
S$81
  Bottom 0.508: RES_I_G1.16 RES_II_G1.1
S$82
  Bottom 0.508: RES_I_G1.15 RES_II_G1.2
S$83
  Bottom 0.508: RES_I_G1.14 RES_II_G1.3
S$84
  Bottom 0.508: RES_I_G1.13 RES_II_G1.4
S$85
  Bottom 0.508: RES_I_G1.12 RES_II_G1.5
S$86
  Bottom 0.508: RES_I_G1.11 RES_II_G1.6
S$87
  Bottom 0.508: RES_I_G1.10 RES_II_G1.7
S$88
  Bottom 0.508: RES_I_G1.9 RES_II_G1.8
S$89
  Bottom 0.508: RES_II_G1.16 GRN_1.1
S$90
  Bottom 0.508: RES_II_G1.15 GRN_1.2
S$91
  Bottom 0.508: GRN_1.3 RES_II_G1.14
S$92
  Bottom 0.508: RES_II_G1.13 GRN_1.4
S$93
  Bottom 0.508: GRN_1.5 RES_II_G1.12
S$94
  Bottom 0.508: RES_II_G1.11 GRN_1.6
S$95
  Bottom 0.508: GRN_1.7 RES_II_G1.10
S$96
  Bottom 0.508: RES_II_G1.9 GRN_1.8
S$97
  Bottom 0.508: SR_1.9 78.74,20.32 80.01,19.05 87.63,19.05 88.9,20.32 SR_2.14
S$98
  Top 0.508: SR_2.9 101.6,20.32 105.41,20.32 106.68,19.05 113.03,19.05 113.03,20.32 SR_3.14
S$99  (via drill 0.6)
  Top 0.508: v33.02,17.78 66.04,17.78 66.04,20.32 SR_1.14 | v7.62,3.81 E$11.31
  Bottom 0.508: v7.62,3.81 20.32,16.51 20.32,17.78 v33.02,17.78
S$100
  Bottom 0.406: 6.35,132.08 3.81,132.08 | 1.27,132.08 3.81,132.08 | 3.81,132.08 3.81,133.35 | 3.81,132.08 3.81,130.81
S$101
  Bottom 0.508: 132.72,5.08 130.18,5.08 | 127.64,5.08 130.18,5.08 | 130.18,5.08 130.18,6.35 | 130.18,5.08 130.18,3.81
S$102
  Bottom 0.406: 6.99,62.23 4.45,62.23 | 1.91,62.23 4.45,62.23 | 4.45,62.23 4.45,63.5 | 4.45,62.23 4.45,60.96
S$103
  Bottom 0.508: SR_3.9 125.73,21.59 125.73,26.67 127,27.94 127,129.54 116.84,129.54 115.57,128.27 115.57,127 SR_4.14
S$104
  Bottom 0.508: TRS_4.8 105.41,113.03 105.41,119.38 SR_4.7
S$105
  Bottom 0.508: TRS_4.7 107.95,113.03 107.95,119.38 SR_4.6
S$106
  Bottom 0.508: TRS_4.6 110.49,113.03 110.49,119.38 SR_4.5
S$107
  Bottom 0.508: TRS_4.5 113.03,113.03 113.03,119.38 SR_4.4
S$108
  Bottom 0.508: TRS_4.4 115.57,113.03 115.57,119.38 SR_4.3
S$109
  Bottom 0.508: TRS_4.3 118.11,113.03 118.11,119.38 SR_4.2
S$110
  Bottom 0.508: TRS_4.2 120.65,113.03 120.65,119.38 SR_4.1
S$111
  Bottom 0.508: TRS_4.1 123.19,113.03 123.19,124.46 119.38,124.46 118.11,125.73 118.11,127 SR_4.15
S$112
  Bottom 0.508: RES_I_G2.8 TRS_4.11
S$113
  Bottom 0.508: TRS_4.12 RES_I_G2.7
S$114
  Bottom 0.508: RES_I_G2.6 TRS_4.13
S$115
  Bottom 0.508: TRS_4.14 RES_I_G2.5
S$116
  Bottom 0.508: RES_I_G2.4 TRS_4.15
S$117
  Bottom 0.508: TRS_4.16 RES_I_G2.3
S$118
  Bottom 0.508: RES_I_G2.2 TRS_4.17
S$119
  Bottom 0.508: TRS_4.18 RES_I_G2.1
S$120
  Bottom 0.508: RES_II_G2.1 RES_I_G2.16
S$121
  Bottom 0.508: RES_I_G2.15 RES_II_G2.2
S$122
  Bottom 0.508: RES_II_G2.3 RES_I_G2.14
S$123
  Bottom 0.508: RES_I_G2.13 RES_II_G2.4
S$124
  Bottom 0.508: RES_II_G2.5 RES_I_G2.12
S$125
  Bottom 0.508: RES_I_G2.11 RES_II_G2.6
S$126
  Bottom 0.508: RES_I_G2.10 RES_II_G2.7
S$127
  Bottom 0.508: RES_II_G2.8 RES_I_G2.9
S$128
  Bottom 0.508: RES_II_G2.16 GRN_2.1
S$129
  Bottom 0.508: RES_II_G2.15 GRN_2.2
S$130
  Bottom 0.508: GRN_2.3 RES_II_G2.14
S$131
  Bottom 0.508: RES_II_G2.13 GRN_2.4
S$132
  Bottom 0.508: GRN_2.5 RES_II_G2.12
S$133
  Bottom 0.508: RES_II_G2.11 GRN_2.6
S$134
  Bottom 0.508: GRN_2.7 RES_II_G2.10
S$135
  Bottom 0.508: RES_II_G2.9 GRN_2.8
S$136
  Bottom 0.508: TRS_5.8 81.28,113.03 81.28,118.11 SR_5.7
S$137
  Bottom 0.508: TRS_5.7 83.82,113.03 83.82,118.11 SR_5.6
S$138
  Bottom 0.508: TRS_5.6 86.36,113.03 86.36,118.11 SR_5.5
S$139
  Bottom 0.508: TRS_5.5 88.9,113.03 88.9,118.11 SR_5.4
S$140
  Top 0.508: SR_5.14 91.44,127 93.98,129.54 101.6,129.54 101.6,127 SR_4.9
S$141
  Bottom 0.508: TRS_5.4 91.44,113.03 91.44,118.11 SR_5.3
S$142
  Bottom 0.508: TRS_5.3 93.98,113.03 93.98,118.11 SR_5.2
S$143
  Bottom 0.508: TRS_5.2 96.52,113.03 96.52,118.11 SR_5.1
S$144
  Top 0.508: TRS_5.1 99.06,113.03 95.25,116.84 95.25,124.46 93.98,125.73 SR_5.15
S$145
  Bottom 0.508: RES_I_B1.8 TRS_5.11
S$146
  Bottom 0.508: TRS_5.12 RES_I_B1.7
S$147
  Bottom 0.508: RES_I_B1.6 TRS_5.13
S$148
  Bottom 0.508: TRS_5.14 RES_I_B1.5
S$149
  Bottom 0.508: RES_I_B1.4 TRS_5.15
S$150
  Bottom 0.508: TRS_5.16 RES_I_B1.3
S$151
  Bottom 0.508: RES_I_B1.2 TRS_5.17
S$152
  Bottom 0.508: TRS_5.18 RES_I_B1.1
S$153
  Bottom 0.508: RES_I_B1.16 RES_II_B1.1
S$154
  Bottom 0.508: RES_II_B1.2 RES_I_B1.15
S$155
  Bottom 0.508: RES_I_B1.14 RES_II_B1.3
S$156
  Bottom 0.508: RES_II_B1.4 RES_I_B1.13
S$157
  Bottom 0.508: RES_I_B1.12 RES_II_B1.5
S$158
  Bottom 0.508: RES_II_B1.6 RES_I_B1.11
S$159
  Bottom 0.508: RES_I_B1.10 RES_II_B1.7
S$160
  Bottom 0.508: RES_II_B1.8 RES_I_B1.9
S$161
  Bottom 0.508: BLU_1.1 RES_II_B1.16
S$162
  Bottom 0.508: RES_II_B1.15 BLU_1.2
S$163
  Bottom 0.508: BLU_1.3 RES_II_B1.14
S$164
  Bottom 0.508: RES_II_B1.13 BLU_1.4
S$165
  Bottom 0.508: BLU_1.5 RES_II_B1.12
S$166
  Bottom 0.508: RES_II_B1.11 BLU_1.6
S$167
  Bottom 0.508: BLU_1.7 RES_II_B1.10
S$168
  Bottom 0.508: RES_II_B1.9 BLU_1.8
S$169
  Bottom 0.508: SR_6.14 67.31,127 69.85,129.54 76.2,129.54 78.74,127 SR_5.9
S$170
  Bottom 0.508: TRS_6.8 57.15,113.03 57.15,118.11 SR_6.7
S$171
  Bottom 0.508: TRS_6.7 59.69,113.03 59.69,118.11 SR_6.6
S$172
  Bottom 0.508: TRS_6.6 62.23,113.03 62.23,118.11 SR_6.5
S$173
  Bottom 0.508: TRS_6.5 64.77,113.03 64.77,118.11 SR_6.4
S$174
  Bottom 0.508: TRS_6.4 67.31,113.03 67.31,118.11 SR_6.3
S$175
  Bottom 0.508: TRS_6.3 69.85,113.03 69.85,118.11 SR_6.2
S$176
  Bottom 0.508: TRS_6.2 72.39,113.03 72.39,118.11 SR_6.1
S$177
  Top 0.508: TRS_6.1 74.93,113.03 74.93,120.65 73.66,121.92 69.85,121.92 69.85,125.73 SR_6.15
S$178
  Bottom 0.508: TRS_6.11 RES_I_B2.8
S$179
  Bottom 0.508: RES_I_B2.7 TRS_6.12
S$180
  Bottom 0.508: TRS_6.13 RES_I_B2.6
S$181
  Bottom 0.508: RES_I_B2.5 TRS_6.14
S$182
  Bottom 0.508: TRS_6.15 RES_I_B2.4
S$183
  Bottom 0.508: RES_I_B2.3 TRS_6.16
S$184
  Bottom 0.508: TRS_6.17 RES_I_B2.2
S$185
  Bottom 0.508: RES_I_B2.1 TRS_6.18
S$186
  Bottom 0.508: RES_II_B2.1 RES_I_B2.16
S$187
  Bottom 0.508: RES_I_B2.15 RES_II_B2.2
S$188
  Bottom 0.508: RES_II_B2.3 RES_I_B2.14
S$189
  Bottom 0.508: RES_I_B2.13 RES_II_B2.4
S$190
  Bottom 0.508: RES_II_B2.5 RES_I_B2.12
S$191
  Bottom 0.508: RES_I_B2.11 RES_II_B2.6
S$192
  Bottom 0.508: RES_II_B2.7 RES_I_B2.10
S$193
  Bottom 0.508: RES_I_B2.9 RES_II_B2.8
S$194
  Bottom 0.508: BLU_2.1 RES_II_B2.16
S$195
  Bottom 0.508: RES_II_B2.15 BLU_2.2
S$196
  Bottom 0.508: BLU_2.3 RES_II_B2.14
S$197
  Bottom 0.508: RES_II_B2.13 BLU_2.4
S$198
  Bottom 0.508: BLU_2.5 RES_II_B2.12
S$199
  Bottom 0.508: RES_II_B2.11 BLU_2.6
S$200
  Bottom 0.508: BLU_2.7 RES_II_B2.10
S$201
  Bottom 0.508: RES_II_B2.9 BLU_2.8
S$202
  Top 0.508: SR_7.14 39.37,127 41.91,129.54 54.61,129.54 54.61,127 SR_6.9
S$203
  Top 0.406: PU1.1 29.21,97.79
  Top 0.508: 29.21,97.79 L1.A1
  Bottom 0.381: 29.21,99.06 PU1.1
  Bottom 0.508: 29.21,99.06 30.48,100.33 43.18,100.33 46.99,104.14 TRS_7.18
S$204
  Bottom 0.508: 134.62,133.35 132.08,133.35 | 129.54,133.35 132.08,133.35 | 132.08,133.35 132.08,134.62 | 132.08,133.35 132.08,132.08
S$205
  Bottom 0.381: L1.C 22.86,95.25
  Bottom 0.508: PD1.1 29.21,95.25 L1.C
  Bottom 0.813: 22.86,95.25 LAYER1.1
S$206
  Top 0.381: PU2.1 30.48,86.36
  Top 0.406: PU2.1 29.21,84.45
  Top 0.508: 29.21,84.45 L2.A1 | 30.48,86.36 30.48,109.22 40.64,109.22 44.45,105.41 TRS_7.17
S$207
  Bottom 0.381: 24.13,82.55 L2.C
  Bottom 0.508: PD2.1 29.21,81.92 L2.C
  Bottom 0.813: 24.13,82.55 21.59,82.55 16.51,87.63 LAYER2.1
S$208
  Bottom 0.508: TRS_7.8 29.21,113.03 29.21,118.11 SR_7.7
S$209
  Bottom 0.508: TRS_7.7 31.75,113.03 31.75,118.11 SR_7.6
S$210
  Bottom 0.508: TRS_7.6 34.29,113.03 34.29,118.11 SR_7.5
S$211
  Bottom 0.508: TRS_7.5 36.83,113.03 36.83,118.11 SR_7.4
S$212
  Bottom 0.508: TRS_7.4 39.37,113.03 39.37,118.11 SR_7.3
S$213
  Bottom 0.508: TRS_7.3 41.91,113.03 41.91,118.11 SR_7.2
S$214
  Bottom 0.508: TRS_7.2 44.45,113.03 44.45,118.11 SR_7.1
S$215
  Top 0.508: TRS_7.1 46.99,113.03 43.18,116.84 43.18,124.46 41.91,125.73 SR_7.15
S$216
  Top 0.381: 29.21,72.39 PU3.1
  Top 0.406: PU3.1 29.21,71.12
  Top 0.508: 29.21,71.12 L3.A1 | 29.21,72.39 31.75,74.93 31.75,97.79 33.02,99.06 33.02,107.95 39.37,107.95 41.91,105.41 TRS_7.16
S$217
  Bottom 0.381: L3.C 22.86,68.58
  Bottom 0.508: PD3.1 29.21,68.58 L3.C
  Bottom 0.813: 22.86,68.58 LAYER3.1
S$218
  Bottom 0.508: 36.2,9.53 33.66,9.53 | 31.11,9.53 33.66,9.53 | 33.66,9.53 33.66,10.79 | 33.66,9.53 33.66,8.26
S$219
  Top 0.381: 29.21,59.69 PU4.1
  Top 0.406: PU4.1 29.21,58.42
  Top 0.508: 29.21,58.42 L4.A1 | 29.21,59.69 33.02,63.5 33.02,97.79 39.37,104.14 TRS_7.15
S$220
  Bottom 0.381: L4.C 22.86,55.88
  Bottom 0.508: PD4.1 29.21,55.88 L4.C
  Bottom 0.813: 22.86,55.88 LAYER4.1
S$221
  Top 0.406: 6.35,132.08 3.81,132.08 | 1.27,132.08 3.81,132.08 | 3.81,132.08 3.81,133.35 | 3.81,132.08 3.81,130.81
S$222
  Top 0.406: 6.99,62.23 4.45,62.23 | 1.91,62.23 4.45,62.23 | 4.45,62.23 4.45,63.5 | 4.45,62.23 4.45,60.96
S$223
  Bottom 0.508: 132.72,5.08 130.18,5.08 | 127.64,5.08 130.18,5.08 | 130.18,5.08 130.18,6.35 | 130.18,5.08 130.18,3.81
S$225
  Bottom 0.508: 134.62,133.35 132.08,133.35 | 129.54,133.35 132.08,133.35 | 132.08,133.35 132.08,134.62 | 132.08,133.35 132.08,132.08
S$226
  Top 0.508: 132.72,5.08 130.18,5.08 | 127.64,5.08 130.18,5.08 | 130.18,5.08 130.18,6.35 | 130.18,5.08 130.18,3.81
S$227
  Top 0.508: 134.62,133.35 132.08,133.35 | 129.54,133.35 132.08,133.35 | 132.08,133.35 132.08,134.62 | 132.08,133.35 132.08,132.08
S$228
  Top 0.508: 132.72,5.08 130.18,5.08 | 127.64,5.08 130.18,5.08 | 130.18,5.08 130.18,6.35 | 130.18,5.08 130.18,3.81
S$229
  Top 0.508: 134.62,133.35 132.08,133.35 | 129.54,133.35 132.08,133.35 | 132.08,133.35 132.08,134.62 | 132.08,133.35 132.08,132.08
S$230
  Top 0.508: 36.2,9.53 33.66,9.53 | 31.11,9.53 33.66,9.53 | 33.66,9.53 33.66,10.79 | 33.66,9.53 33.66,8.26
S$231
  pour Bottom: 12.06,41.91 11.43,44.45 11.43,41.91
VCC
  Top 0.381: 36.83,41.91 36.2,41.95
  Top 0.406: VCC.1 48.26,97.87
  Top 0.508: SR_1.16 E$4.1 57.15,24.77 57.15,28.57 VCC1.1 48.26,29.21 48.26,43.81 53.98,49.53 75.56,49.53 78.74,46.35 | SR_2.16 83.9,22.86 | 83.9,22.86 E$5.1 83.82,25.4 82.55,26.67 82.55,36.83 80.01,36.83 | E$6.1 SR_3.16 107.95,21.59 107.95,22.86 100.33,22.86 99.06,21.59 | E$3.1 72.39,123.19 72.39,125.73 SR_6.16 | E$1.1 120.65,123.19 120.65,127 SR_4.16 | 36.83,41.91 36.83,36.83 | 36.83,36.83 36.83,29.21 E$18.1 | 80.01,36.83 80.01,25.4 76.2,21.59 SR_1.10 | 99.06,21.59 97.79,22.86 83.9,22.86 | 99.06,21.59 SR_2.10 | 83.82,22.86 83.9,22.86 | 80.01,36.83 36.83,36.83 | 48.26,100.97 48.26,109.22 | 48.26,109.22 48.26,119.38 44.45,123.19 E$8.1 | TRS_4.10 102.28,100.38 99.69,97.79 79.38,97.79 78.74,98.42 78.74,105.12 TRS_5.10 78.59,98.28 78.11,97.79 57.15,97.79 55.88,99.06 55.88,104.49 TRS_6.10 53.84,105.28 VCC.1 | TRS_3.10 125.17,47.55 123.19,49.53 102.87,49.53 102.23,48.9 102.23,48.26 | 102.23,43.18 102.23,43.1 TRS_2.10 101.68,42.62 102.23,43.18 | 102.23,43.18 102.23,48.26 | 102.23,48.26 100.97,49.53 80.64,49.53 78.74,47.62 78.74,46.35 | 78.74,43.18 78.74,43.1 TRS_1.10 78.19,42.62 78.74,43.18 | 78.74,43.18 78.74,46.35 | TRS_7.10 26.52,107.17 29.84,110.49 46.99,110.49 48.26,109.22
  Top 1.016: 48.26,97.87 C1.1 40.64,98.42 PU1.2 | 47.62,58.5 E$23.1 40.64,59.05 PU4.2 | 47.62,71.2 E$19.1 40.64,71.75 PU3.2 | 47.62,84.53 C2.1 40.64,85.09 PU2.2
  Bottom 0.508: 44.45,124.46 44.45,125.73 SR_7.16 | 44.45,124.46 44.45,123.19 E$8.1 | 44.45,124.46 30.48,124.46 29.21,125.73 SR_7.10 | 57.15,124.46 57.15,127 SR_6.10 | 44.45,124.46 57.15,124.46 | 80.01,124.46 78.74,123.19 72.39,123.19 E$3.1 | 80.01,124.46 81.28,125.73 | 96.52,124.46 96.52,125.73 SR_5.16 | 96.52,124.46 96.52,123.19 E$2.1 | 102.87,124.46 105.41,127 SR_4.10 | 96.52,124.46 102.87,124.46 | 102.87,124.46 115.57,124.46 116.84,123.19 120.65,123.19 E$1.1 | 81.28,125.73 82.55,124.46 96.52,124.46 | 81.28,125.73 SR_5.10 | 80.01,124.46 57.15,124.46 | SR_3.10 123.19,21.59 118.11,26.67 85.09,26.67 83.82,25.4 E$5.1 | E$11.12 22.3,29.21 E$17.1
  Bottom 1.016: PU1.2 33.02,98.42 33.02,90.81 24.13,90.81 L1.A2 | PU4.2 33.02,59.05 33.02,51.44 24.13,51.44 L4.A2 | PU3.2 33.02,71.75 33.02,64.14 24.13,64.14 L3.A2 | PU2.2 33.02,85.09 33.02,77.47 24.13,77.47 L2.A2
  pour Top: 48.9,100.97 46.35,100.97 46.35,27.3 48.9,27.3
  pour Bottom: 12.7,41.91 12.7,48.26 3.81,48.26 3.81,41.91
  pour Bottom: 22.23,41.27 11.43,41.27 11.43,43.81 22.23,43.81
  pour Top: 19.05,43.81 46.99,43.81 46.99,41.27 19.05,41.27

## Text on the board
Top: RGB-Cube v1 | top
Bottom: RGB-Cube v1 | bottom
bNames: OUT | VCC | CL | LT | OE | IN | O_1 | VCC | OUT | VCC | CL | LT | OE | IN | O_1 | VCC | OUT | VCC | CL | LT | OE | IN | O_1 | VCC | OUT | VCC | CL | LT | OE | IN | O_1 | VCC | IN | OUT | IN | OUT | IN | OUT | IN | OUT | GND | VCC | GND | VCC | LT | OE | VCC | O_1 | IN | OE | LT | CL | VCC | OUT | VCC | O_1 | IN | OE | LT | CL | VCC | OUT | VCC | O_1 | IN | OE | LT | CL | VCC | OUT | OUT | CL